# Altium PCB PCB1.PcbDoc
Units mm, origin at the board's own origin, x right, y up, seen from the top; angles counter-clockwise.
Board outline 25.02 x 57.15 mm, 2 copper layers (Top Layer, Bottom Layer); 3 components, 44 nets, 88 pads, 0 vias.
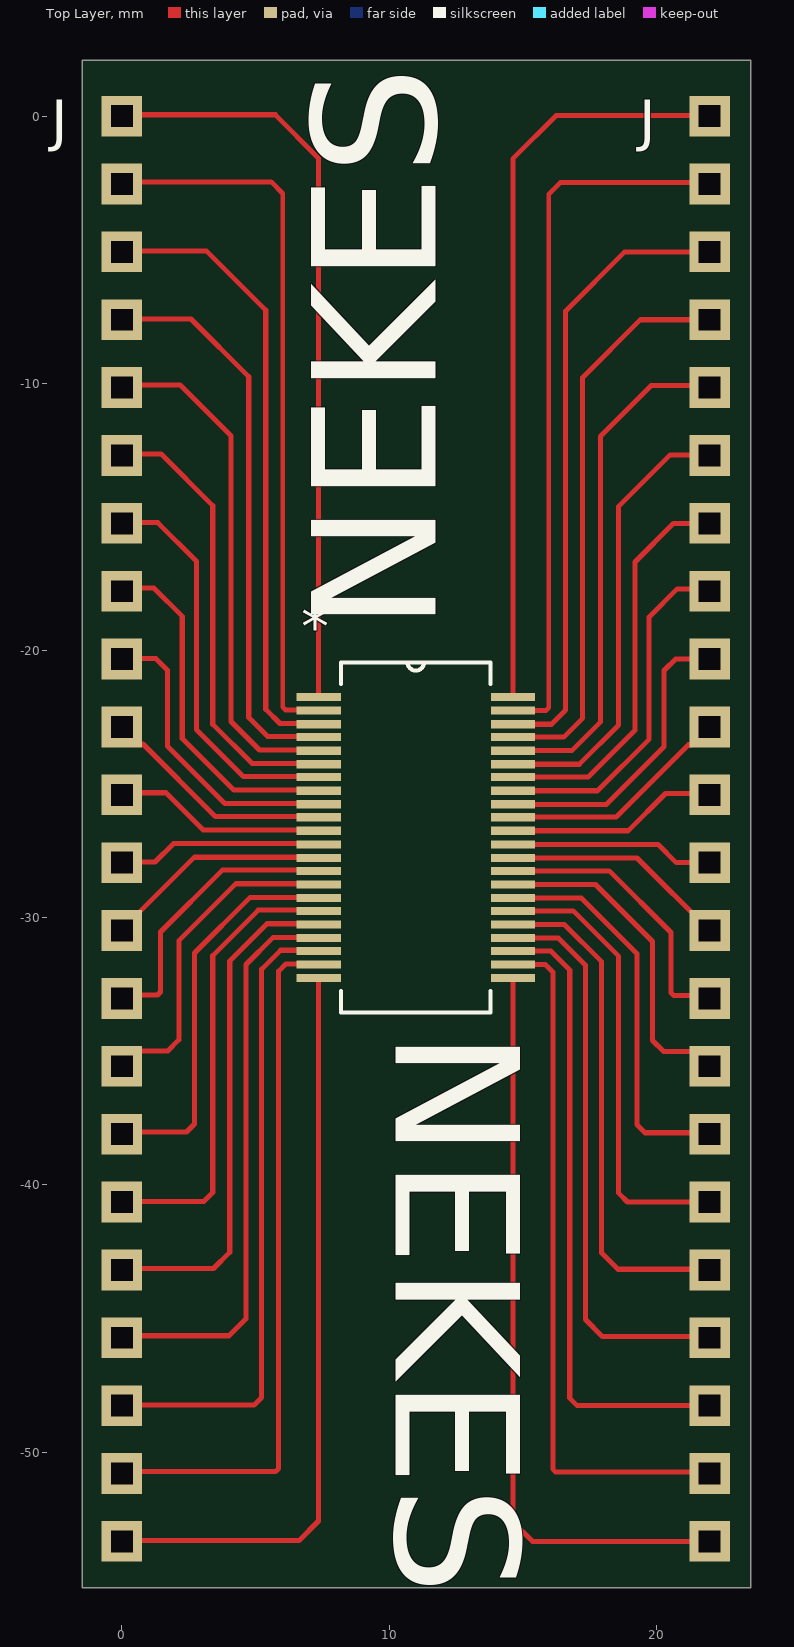
[diagram p0: Top Layer view]
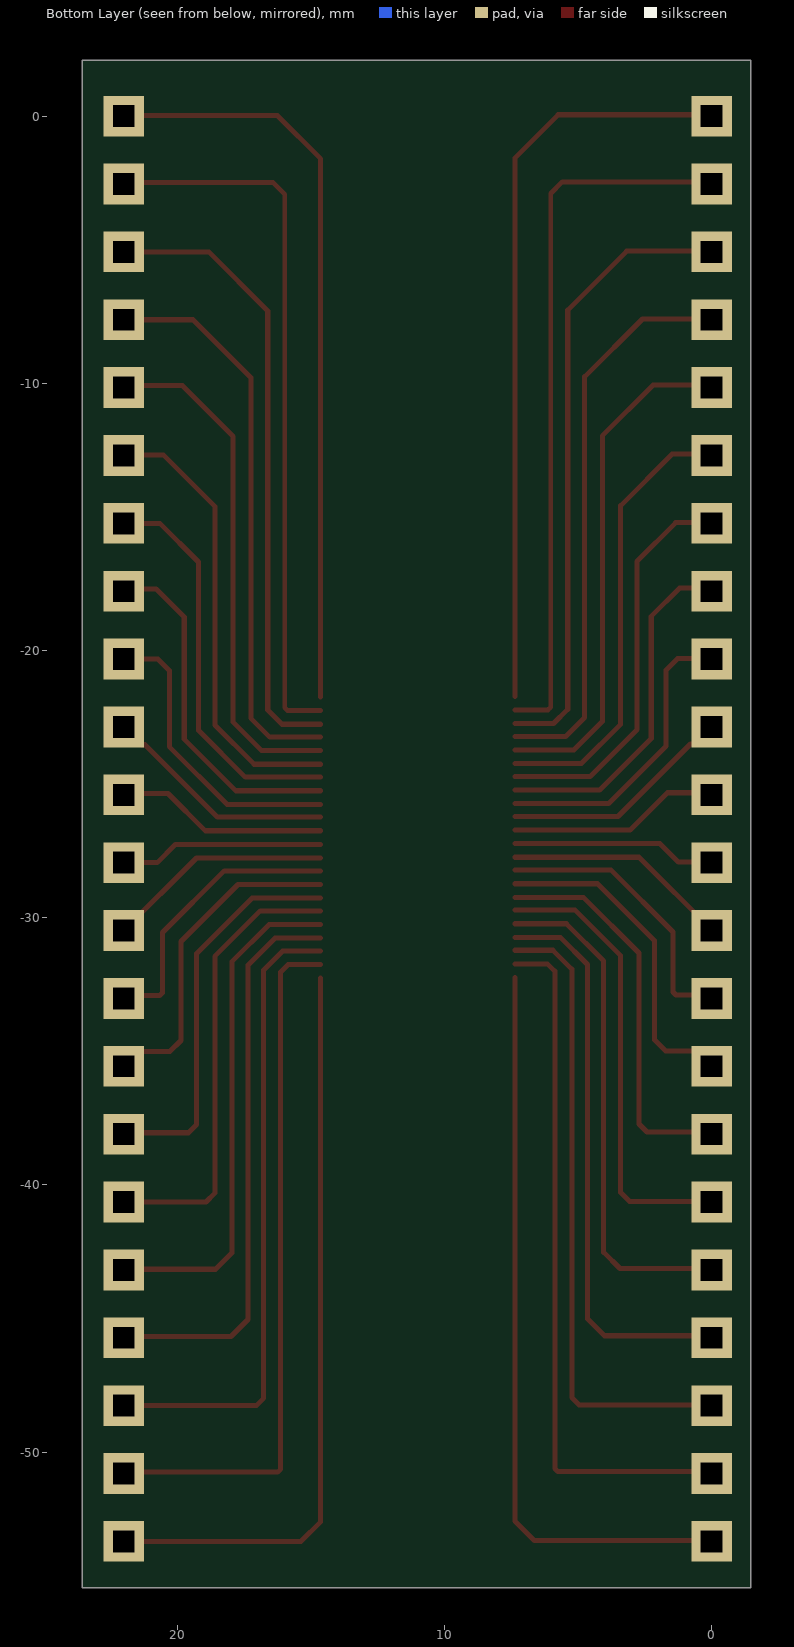
[diagram p1: Bottom Layer view, seen from below]

## Layer stack, top to bottom
Top Solder: solder mask 0.0102, Solder Resist, Dk 3.5
Top Layer: signal copper 0.0356
Dielectric 1: dielectric 0.32, FR-4, Dk 4.8
Bottom Layer: signal copper 0.0356
Bottom Solder: solder mask 0.0102, Solder Resist, Dk 3.5

## Board outline
-1.473,-52.273 -1.473,2.083 23.546,2.083 23.546,-55.067 -1.473,-55.067

## Design rules (kind name [scope] priority, off if disabled: settings)
Clearance [All] p1: gap=0.1 ignorepadtopadclearanceinfootprint=FALSE except(0: Arc-Hole Track-Hole SMDPad-Hole THPad-Hole Via-Hole Fill-Hole Poly-Hole Region-Hole Text-Hole)
PolygonConnect [All] p1: connectstyle=Relief reliefconductorwidth=0.254 reliefentries=4 polygonreliefangle="90 Angle" airgapwidth=0.254
RoomDefinition Sheet1 [InComponentClass('Sheet1')] p1: confinementstyle=ConfineIn formatcopy=TRUE lockcomponents=FALSE outline 112.522,-53.467 131.953,-53.467 131.953,1.905 112.522,1.905
RoutingVias [All] p1: holewidth=0.711 width=1.27 viastyle="Through Hole" minholewidth=0.711 minwidth=1.27 maxholewidth=0.711 maxwidth=1.27
SolderMaskExpansion [All] p1: expansion=0.102 istentingtop=FALSE
Width [All] p1: maxlimit=0.254 minlimit=0.08 preferedwidth=0.1 minimp=50.000000 maximp=50.000000 favimp=50.000000
30 further rules are at their usual default settings.

## Classes and differential pairs
component class Sheet1: *

## Components (designator, comment, footprint, x,y, rotation, side; value= is the part's Value field where it differs from the comment)
* "LTC6802G-2" LTC6802 11,-27 r0 top
J "22xPinheader-2" 22xHEADER-2 22,-53.34 r90 top
J "22xPinheader-1" 22XHEADER1 0,0 r270 top

## Footprints (in the part's own frame and the unit in brackets; to place one, negate y for a bottom-side part, rotate by r counter-clockwise, add the part's x,y. Pads: shape width x height; smd on the part's side, far side on the other; paste and mask are expansions set on the pad)
22XHEADER1 [mil]
  rect 60x60 hole 31.5 square: 1(0,0) 2(100,0) 3(200,0) 4(300,0) 5(400,0) 6(500,0) 7(600,0) 8(700,0) 9(800,0) 10(900,0) 11(1000,0) 12(1100,0) 13(1200,0) 14(1300,0) 15(1400,0) 16(1500,0) 17(1600,0) 18(1700,0) 19(1800,0) 20(1900,0) 21(2000,0) 22(2100,0)
22xHEADER-2 [mil]
  rect 60x60 hole 31.5 square: 23(0,0) 24(100,0) 25(200,0) 26(300,0) 27(400,0) 28(500,0) 29(600,0) 30(700,0) 31(800,0) 32(900,0) 33(1000,0) 34(1100,0) 35(1200,0) 36(1300,0) 37(1400,0) 38(1500,0) 39(1600,0) 40(1700,0) 41(1800,0) 42(1900,0) 43(2000,0) 44(2100,0)
LTC6802 [mil]
  rect 65x12 smd paste+0: 1(-143,207)
  rect 65x12 smd mask+4: 2(-143,187) 3(-143,167)
  rect 65x12 smd: 4(-143,148) 5(-143,128) 6(-143,108) 7(-143,89) 8(-143,69) 9(-143,49) 10(-143,30) 11(-143,10) 12(-143,-10) 13(-143,-30) 14(-143,-49) 15(-143,-69) 16(-143,-89) 17(-143,-108) 18(-143,-128) 19(-143,-148) 20(-143,-167) 21(-143,-187) 22(-143,-207) 23(143,-207) 24(143,-187) 25(143,-167) 26(143,-148) 27(143,-128) 28(143,-108) 29(143,-89) 30(143,-69) 31(143,-49) 32(143,-30) 33(143,-10) 34(143,10) 35(143,30) 36(143,49) 37(143,69) 38(143,89) 39(143,108) 40(143,128) 41(143,148) 42(143,167) 43(143,187) 44(143,207)
  silkscreen extent -110,-258 110,258

## Part data
J J: "Pin header; pin strips; male; PIN: 50; straight; 2.54mm; THT; 1x50", Package=None, Availability=Unavailable, EU_RoHS_Compliance=Compliant, MF="TE Connectivity", MP=5-825433-0, Price=None, SnapEDA_Link=https://www.snapeda.com/parts/5-825433-0/TE%20Connectivity%20AMP%20Connectors/view-part/499889/?ref=snap, TE_purchase_URL=https://www.te.com/usa-en/product-5-825433-0.html?te_bu=Cor&te_type=disp&te_campaign=seda_glo_cor-seda-global-disp-prtnr-fy19-seda-model-bom-cta_sma-317_1&elqCampaignId=32493

## Nets (pads, with @x,y where several pads share a name; then routed paths per layer and width w, separated by ;. In a path a pad name is that pad's centre, name@x,y a point inside that pad or via, vN(x,y) a via of type N, cw(c..) or ccw(c..) an arc to the next point about the centre after c; other vN are vias at no path point)
Net*_1: *.1 J.1 | length 28.2
  Top Layer w0.19: J.1@-0.004,0.025 0.022,0.051 5.74,0.051 7.364,-1.573 *.1@7.364,-21.717
Net*_2: *.2 J.2 | length 26.8
  Top Layer w0.18: J.2@-0.004,-2.515 0.047,-2.464 5.588,-2.464 6.02,-2.896 6.02,-22.119 6.125,-22.225 *.2@7.364,-22.225
Net*_3: *.3 J.3 | length 23.4
  Top Layer w0.19: J.3@-0.004,-5.055 3.175,-5.055 5.385,-7.264 5.385,-22.2 5.918,-22.733 *.3@7.364,-22.733
Net*_4: *.4 J.4 | length 21.3
  Top Layer w0.19: J.4@-0.004,-7.595 2.591,-7.595 4.75,-9.754 4.75,-22.504 5.461,-23.215 *.4@7.364,-23.215
Net*_5: *.5 J.5 | length 19.3
  Top Layer w0.19: J.5@-0.004,-10.135 0.073,-10.058 2.184,-10.058 4.089,-11.963 4.089,-22.657 5.156,-23.723 *.5@7.364,-23.723
Net*_6: *.6 J.6 | length 17
  Top Layer w0.19: J.6@-0.004,-12.675 0.022,-12.649 1.473,-12.649 3.404,-14.58 3.404,-22.758 4.877,-24.231 *.6@7.364,-24.231
Net*_7: *.7 J.7 | length 15
  Top Layer w0.19: J.7@-0.004,-15.215 1.346,-15.215 2.794,-16.662 2.794,-22.962 4.547,-24.714 *.7@7.364,-24.714
Net*_8: *.8 J.8 | length 13.2
  Top Layer w0.19: J.8@-0.004,-17.755 0.085,-17.666 1.206,-17.666 2.261,-18.72 2.261,-23.292 4.191,-25.222 *.8@7.364,-25.222
Net*_9: *.9 J.9 | length 11.3
  Top Layer w0.19: J.9@-0.004,-20.295 1.27,-20.295 1.702,-20.726 1.702,-23.571 3.861,-25.73 *.9@7.364,-25.73
Net*_10: *.10 J.10 | length 8.8
  Top Layer w0.19: J.10@-0.004,-22.835 0.663,-23.502 0.775,-23.502 0.789,-23.502 3.5,-26.213 *.10@7.364,-26.213
Net*_11: *.11 J.11 | length 8
  Top Layer w0.19: J.11@-0.004,-25.375 0.047,-25.324 1.651,-25.324 3.048,-26.721 *.11@7.364,-26.721
Net*_12: *.12 J.12 | length 7.7
  Top Layer w0.19: J.12@-0.004,-27.915 1.245,-27.915 1.931,-27.229 *.12@7.364,-27.229
Net*_13: *.13 J.13 | length 8.5
  Top Layer w0.19: J.13@-0.004,-30.455 2.714,-27.737 *.13@7.364,-27.737
Net*_14: *.14 J.14 | length 10.7
  Top Layer w0.19: J.14@-0.004,-32.995 0.098,-32.893 1.336,-32.893 1.448,-32.782 1.448,-30.531 3.759,-28.219 *.14@7.364,-28.219
Net*_15: *.15 J.15 | length 12.4
  Top Layer w0.19: J.15@-0.004,-35.535 0.547,-34.984 1.719,-34.984 2.134,-34.569 2.134,-30.861 4.267,-28.727 *.15@7.364,-28.727
Net*_16: *.16 J.16 | length 14.8
  Top Layer w0.19: J.16@-0.004,-38.075 0.05,-38.021 2.416,-38.021 2.718,-37.719 2.718,-31.318 4.801,-29.235 *.16@7.364,-29.235
Net*_17: *.17 J.17 | length 17.1
  Top Layer w0.19: J.17@-0.004,-40.615 3.073,-40.615 3.404,-40.284 3.404,-31.42 5.106,-29.718 *.17@7.364,-29.718
Net*_18: *.18 J.18 | length 19.1
  Top Layer w0.19: J.18@-0.004,-43.155 0.022,-43.129 3.429,-43.129 4.039,-42.52 4.039,-31.623 5.436,-30.226 *.18@7.364,-30.226
Net*_19: *.19 J.19 | length 21.3
  Top Layer w0.19: J.19@-0.004,-45.695 0.047,-45.644 4.013,-45.644 4.648,-45.009 4.648,-31.75 5.664,-30.734 *.19@7.364,-30.734
Net*_20: *.20 J.20 | length 23.8
  Top Layer w0.19: J.20@-0.004,-48.235 4.953,-48.235 5.232,-47.955 5.232,-31.928 5.944,-31.216 *.20@7.364,-31.216
Net*_21: *.21 J.21 | length 26.2
  Top Layer w0.19: J.21@-0.004,-50.775 0.047,-50.724 5.756,-50.724 5.867,-50.612 5.867,-32.004 6.147,-31.724 *.21@7.364,-31.724
Net*_22: *.22 J.22 | length 28
  Top Layer w0.19: J.22@-0.004,-53.315 6.629,-53.315 7.364,-52.58 *.22@7.364,-32.232
Net*_23: *.23 J.23 | length 28
  Top Layer w0.19: *.23 14.632,-52.605 15.367,-53.34 J.23
Net*_24: *.24 J.24 | length 26.2
  Top Layer w0.19: *.24 15.849,-31.75 16.129,-32.029 16.129,-50.638 16.24,-50.749 21.949,-50.749 J.24
Net*_25: *.25 J.25 | length 23.8
  Top Layer w0.19: *.25 16.053,-31.242 16.764,-31.953 16.764,-47.981 17.043,-48.26 J.25
Net*_26: *.26 J.26 | length 21.3
  Top Layer w0.19: *.26 16.332,-30.759 17.348,-31.775 17.348,-45.034 17.983,-45.669 21.949,-45.669 J.26
Net*_27: *.27 J.27 | length 19.1
  Top Layer w0.19: *.27 16.561,-30.251 17.958,-31.648 17.958,-42.545 18.567,-43.155 21.975,-43.155 J.27
Net*_28: *.28 J.28 | length 17.1
  Top Layer w0.19: *.28 16.891,-29.743 18.593,-31.445 18.593,-40.31 18.923,-40.64 J.28
Net*_29: *.29 J.29 | length 14.8
  Top Layer w0.19: *.29 17.196,-29.261 19.279,-31.344 19.279,-37.744 19.58,-38.046 21.946,-38.046 J.29
Net*_30: *.30 J.30 | length 12.4
  Top Layer w0.19: *.30 17.729,-28.753 19.863,-30.886 19.863,-34.595 20.277,-35.009 21.449,-35.009 J.30
Net*_31: *.31 J.31 | length 10.7
  Top Layer w0.19: *.31 18.237,-28.245 20.549,-30.556 20.549,-32.807 20.66,-32.918 21.898,-32.918 J.31
Net*_32: *.32 J.32 | length 8.5
  Top Layer w0.19: *.32 19.282,-27.762 J.32
Net*_33: *.33 J.33 | length 7.7
  Top Layer w0.19: *.33 20.066,-27.254 20.752,-27.94 J.33
Net*_34: *.34 J.34 | length 8
  Top Layer w0.19: *.34 18.949,-26.746 20.345,-25.349 21.949,-25.349 J.34
Net*_35: *.35 J.35 | length 8.8
  Top Layer w0.19: *.35 18.496,-26.238 21.207,-23.527 21.222,-23.527 21.333,-23.527 J.35
Net*_36: *.36 J.36 | length 11.3
  Top Layer w0.19: *.36 18.136,-25.755 20.295,-23.597 20.295,-20.752 20.726,-20.32 J.36
Net*_37: *.37 J.37 | length 13.2
  Top Layer w0.19: *.37 17.806,-25.247 19.736,-23.317 19.736,-18.745 20.79,-17.691 21.911,-17.691 J.37
Net*_38: *.38 J.38 | length 15
  Top Layer w0.19: *.38 17.45,-24.74 19.202,-22.987 19.202,-16.688 20.65,-15.24 J.38
Net*_39: *.39 J.39 | length 17
  Top Layer w0.19: *.39 17.12,-24.257 18.593,-22.784 18.593,-14.605 20.523,-12.675 21.975,-12.675 J.39
Net*_40: *.40 J.40 | length 19.3
  Top Layer w0.19: *.40 16.84,-23.749 17.907,-22.682 17.907,-11.989 19.812,-10.084 21.924,-10.084 J.40
Net*_41: *.41 J.41 | length 21.3
  Top Layer w0.19: *.41 16.536,-23.241 17.247,-22.53 17.247,-9.779 19.406,-7.62 J.41
Net*_42: *.42 J.42 | length 23.4
  Top Layer w0.19: *.42 16.078,-22.758 16.612,-22.225 16.612,-7.29 18.821,-5.08 J.42
Net*_43: *.43 J.43 | length 26.8
  Top Layer w0.18: *.43 15.871,-22.25 15.977,-22.145 15.977,-2.921 16.408,-2.489 21.949,-2.489 J.43
Net*_44: *.44 J.44 | length 28.2
  Top Layer w0.19: *.44 14.632,-1.598 16.256,0.025 21.975,0.025 J.44

## Silkscreen, mask and mechanical layers (free items; w line width, h text height)
Top Overlay:
  text "NEKES" at 13.275,-19.28 h8 r90
  text "NEKES" at 8.721,-34.212 h8 r270
Mechanical 1:
  the board outline again, w0.254